# Altium PCB Marvin_PCB_v3.PcbDoc
Units mm, origin at the board's own origin, x right, y up, seen from the top; angles counter-clockwise.
Board outline 72 x 82 mm, 2 copper layers (Top Layer, Bottom Layer); 46 components, 30 nets, 138 pads, 12 vias.
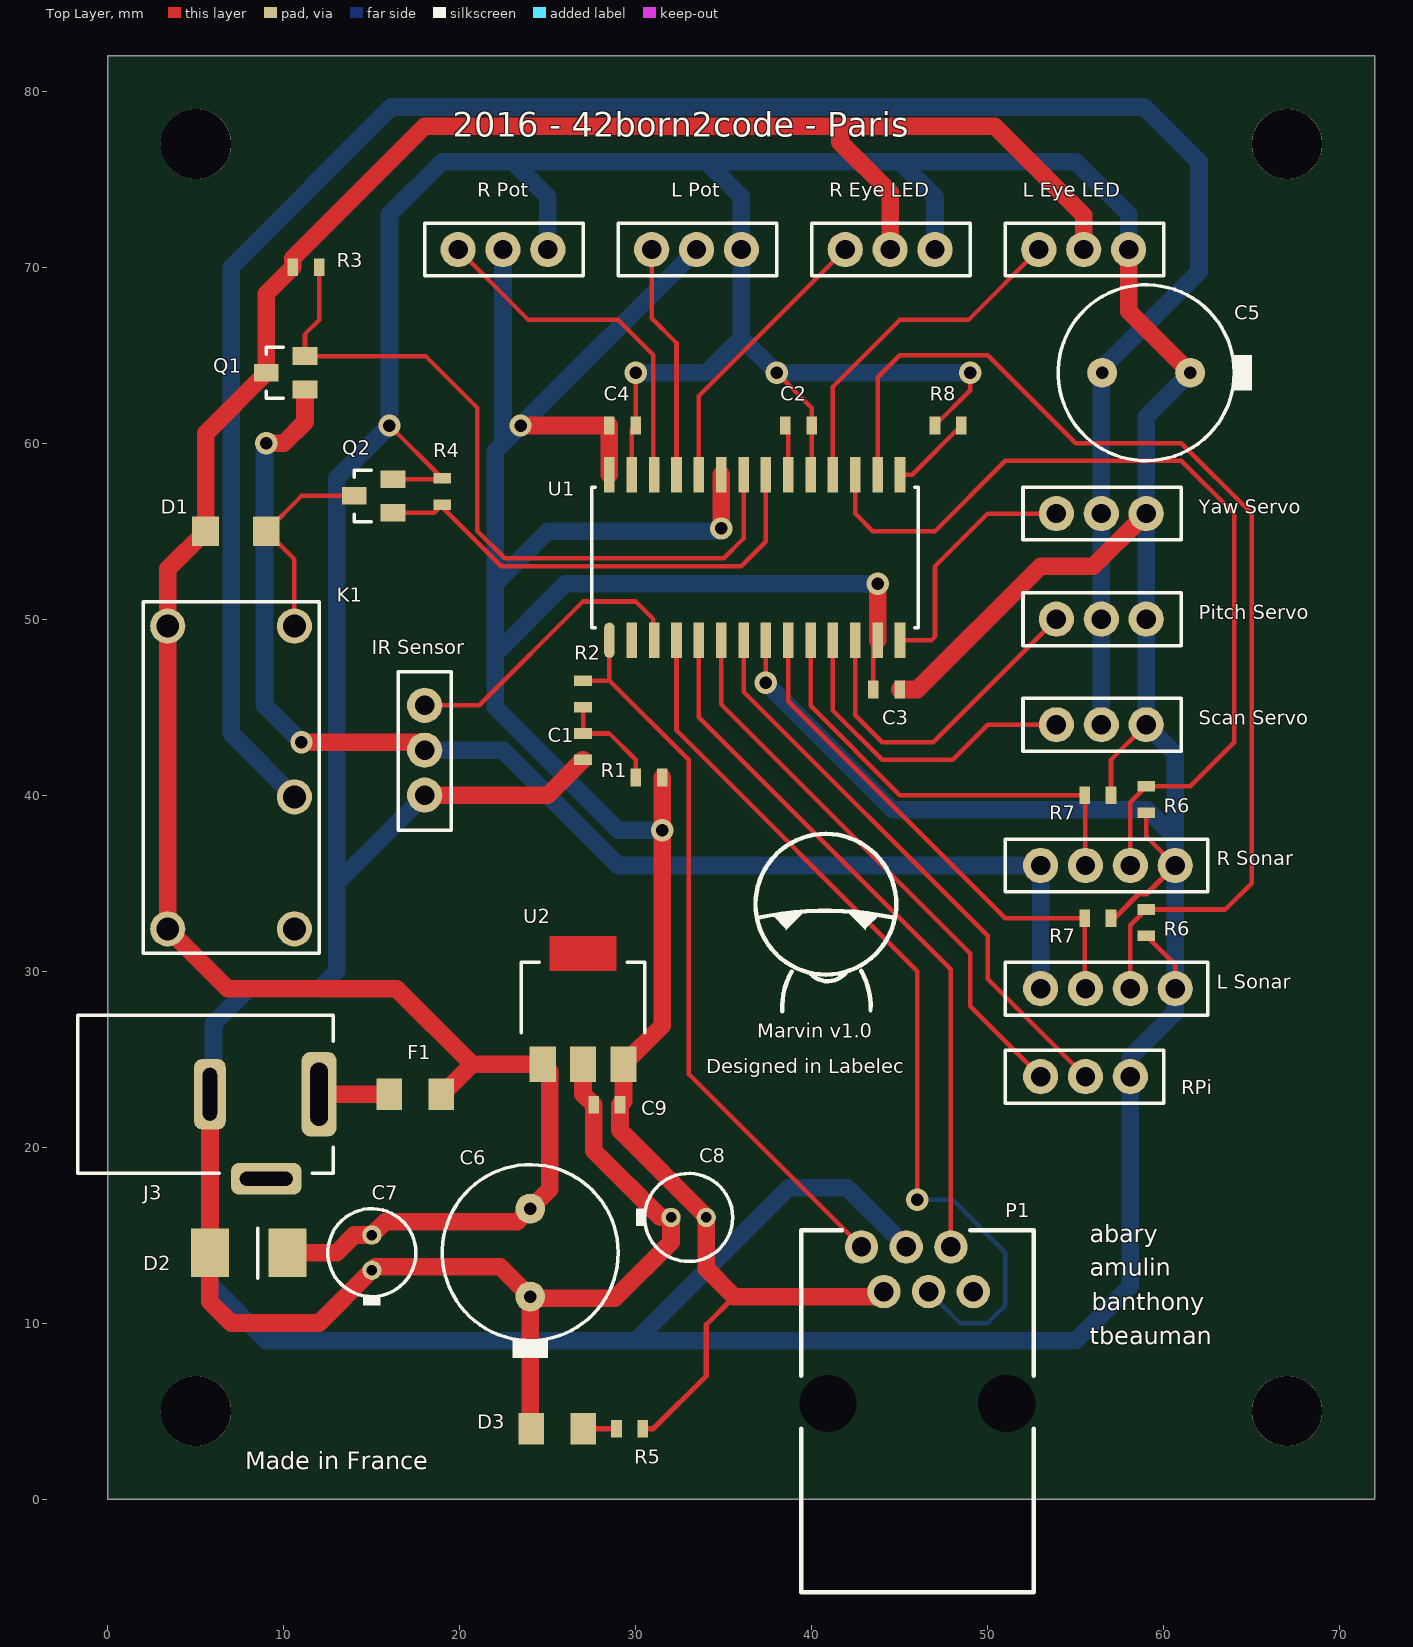
[diagram p0: Top Layer view]
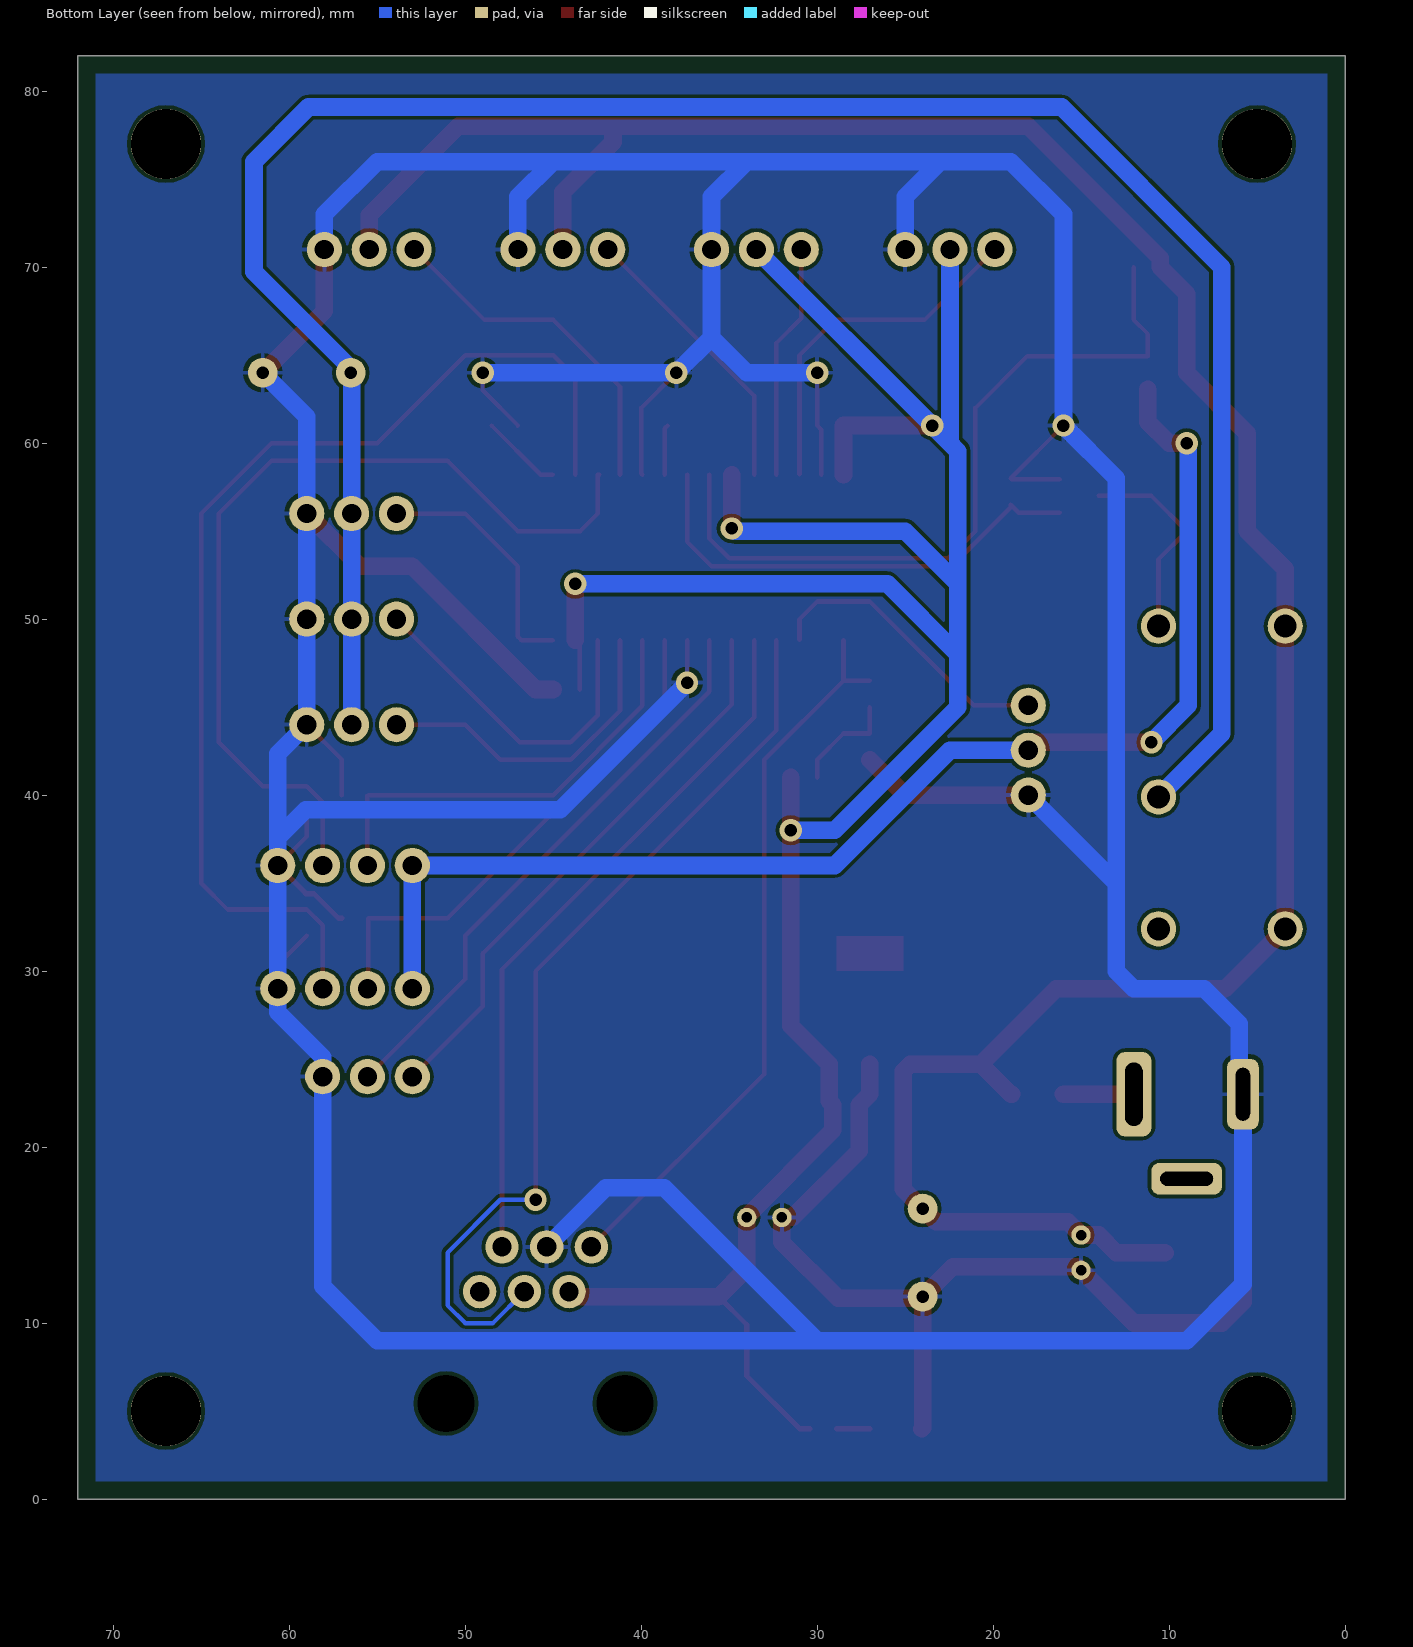
[diagram p1: Bottom Layer view, seen from below]

## Layer stack, top to bottom
Top Solder: solder mask 0.0102, Solder Resist, Dk 3.5
Top Layer: signal copper 0.0356
Dielectric 1: dielectric 0.32, FR-4, Dk 4.8
Bottom Layer: signal copper 0.0356
Bottom Solder: solder mask 0.0102, Solder Resist, Dk 3.5

## Board outline
0,0 72,0 72,82 0,82

## Design rules (kind name [scope] priority, off if disabled: settings)
Clearance [All] p1: gap=0.2
HoleSize [All] p1: absolutevalues=TRUE maxlimit=5 minlimit=0.3 maxpercent=80.000 minpercent=20.000
MinimumSolderMaskSliver [All] p1: minsoldermaskwidth=0.15
PolygonConnect [All] p1: connectstyle=Relief reliefconductorwidth=0.254 reliefentries=4 polygonreliefangle="90 Angle" airgapwidth=0.254
RoutingVias [All] p1: holewidth=0.3 width=0.7 viastyle="Through Hole" minholewidth=0.3 minwidth=0.7 maxholewidth=1 maxwidth=3
SilkToBoardRegionClearance [NOT InComponent('J3')AND NOT InComponent('P1')AND NOT InComponent('Marvin')] p1:
SolderMaskExpansion [All] p1: expansion=0.102
UnpouredPolygon [All] p1: allowunpoured=FALSE
Width [All] p1: maxlimit=2 minlimit=0.2 preferedwidth=0.2
26 further rules are at their usual default settings.

## Classes and differential pairs
channel class Sonar: U_Sonar1 U_Sonar2
channel class Servo: U_Servo1 U_Servo2 U_Servo3
channel class Potard: U_Potard1 U_Potard2
channel class LED_V3: U_LED_V31 U_LED_V32
component class U_Sonar2: J6_S2 J6_U_Sonar2 R6_U_Sonar1 R7_U_Sonar2
component class U_Sonar1: J6_S1 "R Sonar"
component class U_Servo3: J5_SERV3 J5_U_Servo3
component class U_Servo2: J5_SERV2 J5_U_Servo2
component class U_Servo1: J5_SERV1 J5_U_Servo1
component class U_RPI: J4 J4_RPI
component class U_Regul: C6 C7 C8 C9 D2 D3 F1 J3 R5 U2
component class U_Power_v2: C5 D1 K1 Q1 Q2 R3 R4
component class U_Potard2: J2_P2 J2_U_Potard2
component class U_Potard1: J2_P1
component class U_PIC: C1 C2 C3 C4 P1 R1 R2 R8 U1
component class U_LED_V32: J7_LED2 J7_U_LED_V32
component class U_LED_V31: J7_LED1
component class U_IrSensor: J1 J1_IR

## Components (designator, comment, footprint, x,y, rotation, side; value= is the part's Value field where it differs from the comment)
C1 "100nF" "1608 / 0603" 27,42 r90 top
C2 "10uF" "1608 / 0603" 40,61 r180 top
C3 "100nF" "1608 / 0603" 45,46 r180 top
C4 "100nF" "1608 / 0603" 30,61 r180 top
C5 "470uF" CONDO_D_10MM 59,64 r90 top
C6 "470uF" CONDO_D_10MM 24,14 r0 top
C7 "10uF" CONDO_D_5MM 15,14 r0 top
C8 "10uF" CONDO_D_5MM 33,16 r270 top
C9 "Cap" "1608 / 0603" 27.6,22.4 r0 top
D1 "GF1A" SMA/DO-214AC_21 9,55 r180 top
D2 "D Zener 1N5338BRLG" "DIODE ZENER" 8,14 r0 top
D3 "*" "3216 / 1206" 27,4 r180 top
F1 "MCPFP 5A 125V" "3216 / 1206" 16,23 r0 top
"IR Sensor" "IR_Connector" "IR SENSOR CONNECTOR" 18,40 r90 top (schematic designator J1)
J3 "PWR2.5" RAPC712BK 12,23 r270 top
K1 "Relay-SPDT G5V-1" PE014005 7,41 r270 top
"L Eye LED" "Leds_Connector" "LEDS CONNECTOR" 58,71 r180 top (schematic designator J7)
"L Pot" "Potard_Connector" "POTARD CONNECTOR" 36,71 r180 top (schematic designator J2)
"L Sonar" "Sonar_Connector" "SONAR CONNECTOR" 53,29 r0 top (schematic designator J6)
"Marvin v1.0" "" MARVIN 40.8,33.8 r0 top
P1 "" RJ11 46,5 r180 top
"Pitch Servo" "Servo_Connector" "SERVO CONNECTOR" 59,50 r180 top (schematic designator J5)
Q1 "MOSFET-P ZVP2106A" SOT23 9,64 r90 top
Q2 "MOSFET-N 2N7002K" SOT23 14,57 r90 top
R1 "10K" "1608 / 0603" 30,41 r0 top
R2 "1K" "1608 / 0603" 27,45 r90 top
R3 "1K" "1608 / 0603" 12,70 r180 top
R4 "1K" "1608 / 0603" 19,58 r270 top
R5 "1K" "1608 / 0603" 28.9,4 r0 top
R6 "1K" "1608 / 0603" 59,32 r90 top
R6 "1K" "1608 / 0603" 59,39 r90 top
R7 "1K" "1608 / 0603" 57,33 r180 top
R7 "1K" "1608 / 0603" 57,40 r180 top
R8 "10K" "1608 / 0603" 47,61 r0 top
"R Eye LED" "Leds_Connector" "LEDS CONNECTOR" 47,71 r180 top (schematic designator J7)
"R Pot" "Potard_Connector" "POTARD CONNECTOR" 25,71 r180 top (schematic designator J2)
"R Sonar" "Sonar_Connector" "SONAR CONNECTOR" 53,36 r0 top (schematic designator J6)
RPi "RPi_Connector" "RPI CONNECTOR" 53,24 r0 top (schematic designator J4)
"Scan Servo" "Servo_Connector" "SERVO CONNECTOR" 59,44 r180 top (schematic designator J5)
U1 "PIC32MX270F256B" SOIC28 38,54 r0 top
U2 "Regul LD1117S33TR" SOT-223 27,31 r0 top
"Yaw Servo" "Servo_Connector" "SERVO CONNECTOR" 59,56 r180 top (schematic designator J5)
? "" MOUNTING_HOLE 67,77 r0 top
? "" MOUNTING_HOLE 67,5 r0 top
? "" MOUNTING_HOLE 5,5 r0 top
? "" MOUNTING_HOLE 5,77 r0 top

## Footprints (in the part's own frame and the unit in brackets; to place one, negate y for a bottom-side part, rotate by r counter-clockwise, add the part's x,y. Pads: shape width x height; smd on the part's side, far side on the other; paste and mask are expansions set on the pad)
"1608 / 0603" [mm] "0603"
  rect 0.6x1 smd mask+0.2: 1(0,0) 2(1.5,0)
"3216 / 1206" [mm]
  rect 1.45x1.8 smd mask+0.2: 1(0,0) 2(2.95,0)
CONDO_D_5MM [mm]
  round 1.1 hole 0.6 mask+0.2: 1(0,-1) 2(0,1)
  silkscreen extent -2.5,-3 2.5,2.5, body extent -2.48,-2.49 2.5,2.5, height 11.2
CONDO_D_10MM [mm]
  round 1.7 hole 0.7 mask+0.2: 1(0,-2.5) 2(0,2.5)
  silkscreen extent -5,-6 5,5, body extent -4.96,-4.99 5,4.99, height 12.7
"DIODE ZENER" [mm]
  rect 2.159x2.743 smd mask+0.2: 1(-2.21,0) 2(2.21,0)
  silkscreen extent 0.51,-1.45 0.51,1.4
"IR SENSOR CONNECTOR" [mm]
  round 2 hole 1.1 mask+0.2: 1(0,0) 2(2.55,0) 3(5.1,0)
  silkscreen extent -2,-1.5 7,1.5, body extent -1.27,-1.27 6.35,1.27, height 9.5
"LEDS CONNECTOR" [mm]
  round 2 hole 1.1 mask+0.2: 1(0,0) 2(2.55,0) 3(5.1,0)
  silkscreen extent -2,-1.5 7,1.5, body extent -1.27,-1.27 6.35,1.27, height 9.5
MARVIN [mm]
  silkscreen extent -4,-6.09 4,4
MOUNTING_HOLE [mm]
  round 4 hole 4 unplated mask+1: 8(0,0)
PE014005 [mm] "RELAIS PE014005"
  round 2 hole 1.3 mask+0.2: 11(1.1,3.6) 12(8.6,-3.6) 14(8.6,3.6) A1(-8.6,3.6) A2(-8.6,-3.6)
  silkscreen extent -10,-5 10,5, body extent -10,-5 10,5, height 10
"POTARD CONNECTOR" [mm]
  round 2 hole 1.1 mask+0.2: 1(0,0) 2(2.55,0) 3(5.1,0)
  silkscreen extent -2,-1.5 7,1.5, body extent -1.27,-1.27 6.35,1.27, height 9.5
RAPC712BK [mm] "PRISE JACK RAPC712BK"
  rrect50% 4.8x2 hole 1 slot 3.6 at 0 deg mask+0.2: 1(0,0)
  rrect50% 4x1.8 hole 0.8 slot 3 at 0 deg mask+0.2: 2(0,-6.2)
  rrect50% 1.8x4 hole 0.8 slot 3 at 90 deg mask+0.2: 3(4.8,-3)
  silkscreen extent -4.5,-13.7 4.5,0.8
RJ11 [mm]
  round 1.9 hole 1.1 mask+0.2: 1(3.175,-9.325) 2(1.905,-6.785) 3(0.635,-9.325) 4(-0.635,-6.785) 5(-1.905,-9.325)
  round 1.9 hole 1.1 unplated mask+0.2: 6(-3.175,-6.785)
  round 1.524 hole 3.25 unplated mask+0.2: ""(-5.08,-0.435) ""(5.08,-0.435)
  silkscreen extent -6.61,-10.29 6.61,10.29
"RPI CONNECTOR" [mm]
  round 2 hole 1.1 mask+0.2: 1(2.55,0) 2(0,0) 3(5.1,0)
  silkscreen extent -2,-1.5 7,1.5, body extent -1.27,-1.27 6.35,1.27, height 9.5
"SERVO CONNECTOR" [mm]
  round 2 hole 1.1 mask+0.2: 1(0,0) 2(2.55,0) 3(5.1,0)
  silkscreen extent -2,-1.5 7,1.5, body extent -1.27,-1.27 6.35,1.27, height 9.5
SMA/DO-214AC_21 [mm]
  rect 1.52x1.68 smd mask+0.2: 1(0,0) 2(3.45,0)
SOIC28 [mm] "PIC32MX270F256B"
  oval 0.6x2 smd mask+0.2: 1(-9.5,-5.2)
  rect 0.6x2 smd mask+0.2: 2(-8.23,-5.2) 3(-6.96,-5.2) 4(-5.69,-5.2) 5(-4.42,-5.2) 6(-3.15,-5.2) 7(-1.88,-5.2) 8(-0.61,-5.2) 9(0.66,-5.2) 10(1.93,-5.2) 11(3.2,-5.2) 12(4.47,-5.2) 13(5.74,-5.2) 14(7.01,-5.2) 15(7.01,4.2) 16(5.74,4.2) 17(4.47,4.2) 18(3.2,4.2) 19(1.93,4.2) 20(0.66,4.2) 21(-0.61,4.2) 22(-1.88,4.2) 23(-3.15,4.2) 24(-4.42,4.2) 25(-5.69,4.2) 26(-6.96,4.2) 27(-8.23,4.2) 28(-9.5,4.2)
  silkscreen extent -10.5,-4.5 8.05,3.5, body extent -10.26,-5.58 7.82,4.58, height 2
"SONAR CONNECTOR" [mm]
  round 2 hole 1.1 mask+0.2: 1(0,0) 2(2.55,0) 3(5.1,0) 4(7.65,0)
  silkscreen extent -2,-1.5 9.5,1.5, body extent -1.27,-1.27 8.89,1.27, height 9.5
SOT23 [mm] "MOSFET N 2N7002K"
  rect 1x1.4 smd mask+0.2: 1(-0.95,-2.2) 2(0.95,-2.2) 3(0,0)
  silkscreen extent -1.46,-0.97 1.46,0
SOT-223 [mm] "LD1117S33TR"
  rect 1.5x2 smd mask+0.2: 1(-2.3,-6.3) 2(0,-6.3) 3(2.3,-6.3)
  Top Layer region: -1.9,-1 1.9,-1 1.9,1 -1.9,1
  silkscreen extent -3.5,-4.5 3.5,-0.5

## Part data
C1 C2 C3 C4 C5 C6 C7 C8: library part Cap, "Capacitor"
C9: "Capacitor"
D1: library part Diode, "Default Diode"
D2: library part "D Zener", "Zener Diode"
D3: library part LED0, "Green LED"
F1: library part "Fuse 1", "Fuse"
"IR Sensor" "L Eye LED" "L Pot" "Pitch Servo" "R Eye LED" "R Pot" RPi "Scan Servo" "Yaw Servo": "Female Embase 3 contacts"
J3: "Jack Connector"
K1: library part Relay-SPDT, "Relay"
"L Sonar" "R Sonar": "Female Embase 4 contacts"
P1: library part "Header 6", "RJ11 Connector"
Q1: library part MOSFET-P, "P-Channel MOSFET"
Q2: library part MOSFET-N, "N-Channel MOSFET"
R1 R2 R3 R4 R5 R6 R6 R7 R7 R8: library part Res1, "Resistor"
U2: library part "Volt Reg", "Voltage Regulator"

## Via types
v1: diameter 1.27, hole 0.711, Top Layer to Bottom Layer, 12 vias

## Nets (pads, with @x,y where several pads share a name; then routed paths per layer and width w, separated by ;. In a path a pad name is that pad's centre, name@x,y a point inside that pad or via, vN(x,y) a via of type N, cw(c..) or ccw(c..) an arc to the next point about the centre after c; other vN are vias at no path point)
3V3MAIN: "L Pot.2" "R Pot.2" C3.2 C4.2 C8.2 C9.2 P1.2 R1.2 R5.2 U1.13 U1.23 U1.28 U2.3 | length 159.9
  Top Layer w0.258: C3.2 43.5,48.56 U1.13
  Top Layer w0.3: R5.2 31,4 34,7 34,9.9 35.6,11.5
  Top Layer w1: v1(23.45,61) C4.2 U1.28 ; R1.2 v1(31.5,38) 31.5,26.9 U2.3 29.3,22.6 C9.2 29.1,20.951 34,16.051 C8.2 34,13.1 35.6,11.5 P1.2@43.81,11.5 ; v1(34.85,55.15) U1.23 ; U1.13 v1(43.74,52)
  Bottom Layer w1: 22.45,71 22.45,60 ; v1(31.5,38) 29,38 22,45 22,48 ; 33.45,71 v1(23.45,61) 22.45,60 ; v1@34.7,55 25,55 22,52 ; v1(43.74,52) 26,52 22,48 ; 22,48 22,52 ; 22,52 22,59.55 22.45,60
5VIN: F1.1 J3.1 | length 4
  Top Layer w1: J3.1 F1.1
5VMAIN: "L Eye LED.2" "R Eye LED.2" C6.2 C7.2 D1.2 D2.2 F1.2 K1.12 K1.A2 Q1.3 R3.2 U2.1 | length 151.9
  Top Layer w1: D2.2 13,14 14,15 C7.2 15.75,15.75 23.25,15.75 C6.2 25.1,17.6 25.1,24.3 U2.1 20.7,24.7 ; F1.2 19,23 20.7,24.7 ; 44.45,71 44.45,74.25 41.6,77.1 41.6,78 ; 55.45,71 55.45,72.95 50.4,78 41.6,78 ; 20.7,24.7 16.4,29 6.8,29 K1.12 K1.A2 3.4,52.85 D1.2 5.55,60.55 Q1.3 9,68.5 R3.2 10.5,70.5 18,78 41.6,78
GND: "IR Sensor.1" "L Eye LED.1" "L Pot.1" "L Sonar.4" "Pitch Servo.1" "R Eye LED.1" "R Pot.1" "R Sonar.4" "Scan Servo.1" "Yaw Servo.1" C1.1 C2.1 C3.1 C4.1 C5.1 C6.1 C7.1 C8.1 C9.1 D2.1 D3.2 J3.2 P1.3 Q2.2 R4.1 R6.1 R7.1 R8.1 RPi.3 U1.8 U1.19 U1.27 U2.2 | length 461.8
  Top Layer w0.258: v1(16,61) R4.1 18.95,57.95 Q2.2 ; U1.27 29.77,60.77 C4.1 v1(30,64) ; v1(37.39,46.39) U1.8 ; v1(38,64) 40,62 C2.1 40,58.27 U1.19 ; R8.1 49,63 v1(49,64) ; R7.1@57,40 57,42 59,44 ; R6.1@59,32 60.65,30.35 60.65,29 ; R6.1@59,39 59,37.65 60.65,36
  Top Layer w0.3: R7.1@57,33 57.2,33 58.6,34.4 59.05,34.4 60.65,36
  Top Layer w1: J3.2 5.8,14.01 D2.1 5.79,11.21 7,10 12,10 C7.1 ; C7.1@15.2,13.2 22.3,13.2 C6.1 24,4.05 D3.2 ; 18,40 25,40 C1.1 ; C6.1@24.1,11.4 28.8,11.4 32,14.6 C8.1 31.4,16 27.6,19.8 C9.1 27,23 U2.2 ; C3.1 46,46 53,53 56,53 59,56 ; 58,71 58,67.5 C5.1
  Bottom Layer w1: 13,35 18,40 ; 25,71 25,74 23,76 ; v1(30,64) 34,64 36,66 ; v1(37.39,46.39) 44.605,39.175 59.063,39.175 60.65,37.588 ; P1.3 42,17.69 38.69,17.69 30,9 ; 47,71 47,74 45,76 ; v1(49,64) v1(38,64) 36,66 ; 58,71 58,73 55,76 45,76 ; C5.1 59,61.5 59,56 59,50 59,44 60.65,42.35 60.65,37.588 ; 23,76 34,76 ; 23,76 19,76 16,73 v1(16,61) 13,58 13,30 12,29 8,29 6,27 6,23.2 J3.2 5.8,12.2 9,9 30,9 ; 30,9 55,9 58.1,12.1 RPi.3 58.1,25.1 60.65,27.65 60.65,29 60.65,36 60.65,37.588 ; 34,76 45,76 ; 34,76 36,74 36,71 36,66
MCLR: P1.1 R2.2 U1.1 | length 41.9
  Top Layer w0.258: R2.2 28.5,46.5 ; U1.1 28.5,46.5 ; P1.1 33,24.15 33,42 28.5,46.5
NetC1_2: C1.2 R1.1 R2.1 | length 6.1
  Top Layer w0.258: R2.1 C1.2 28.5,43.5 30,42 R1.1
NetC2_2: C2.2 U1.20 | length 2.9
  Top Layer w0.258: C2.2 38.66,60.84 U1.20
NetD1_1: D1.1 K1.A1 Q2.3 | length 11.9
  Top Layer w0.258: K1.A1 10.6,53.4 D1.1 11,57 Q2.3
NetD3_1: D3.1 R5.1 | length 1.9
  Top Layer w0.3: D3.1 R5.1
NetJ1_3: "IR Sensor.3" U1.3 | length 17
  Top Layer w0.258: 18,45.1 21.1,45.1 27,51 30,51 31,50 U1.3@31,48.84
NetJ2_U_Potard1_3: "R Pot.3" U1.26 | length 20.3
  Top Layer w0.258: 19.9,71 23.9,67 29,67 31,65 U1.26@31,58.24
NetJ2_U_Potard2_3: "L Pot.3" U1.25 | length 13.4
  Top Layer w0.258: 30.9,71 30.9,67.1 32.31,65.69 U1.25
NetJ4_1: RPi.1 U1.7 | length 32.8
  Top Layer w0.258: U1.7 36.12,45.88 50,32 50,29.55 RPi.1
NetJ4_2: RPi.2 U1.6 | length 32.3
  Top Layer w0.258: U1.6 34.85,45.15 49,31 49,28 RPi.2
NetJ5_U_Servo1_3: "Yaw Servo.3" U1.14 | length 14.2
  Top Layer w0.258: U1.14 46.8,48.8 47,49 47,53 50,56 53.9,56
NetJ5_U_Servo2_3: "Pitch Servo.3" U1.12 | length 19.2
  Top Layer w0.258: U1.12 42.47,44.53 44,43 46.9,43 53.9,50
NetJ5_U_Servo3_3: "Scan Servo.3" U1.11 | length 18.7
  Top Layer w0.258: U1.11 41.2,44.8 44,42 48,42 50,44 53.9,44
NetJ6_U_Sonar1_2: "R Sonar.2" R7.2@55.5,40 U1.10 | length 25.4
  Top Layer w0.258: U1.10 39.93,45.07 45,40 55.5,40 55.55,39.95 55.55,36
NetJ6_U_Sonar1_3: "R Sonar.3" R6.2@59,40.5 U1.17 | length 51.1
  Top Layer w0.258: U1.17@42.371,58.2 U1.17 42.47,56 43.47,55 47,55 51,59 61,59 64,56 64,43 61.5,40.5 59,40.5 58.1,39.6 58.1,36
NetJ6_U_Sonar2_2: "L Sonar.2" R7.2@55.5,33 U1.9 | length 29.4
  Top Layer w0.258: U1.9 38.66,45.34 51,33 55.5,33 55.5,29.05 55.55,29
NetJ6_U_Sonar2_3: "L Sonar.3" R6.2@59,33.5 U1.16 | length 63.5
  Top Layer w0.258: U1.16 43.74,63.74 45,65 50,65 55,60 61,60 65,56 65,35 63.5,33.5 59,33.5 58.1,32.6 58.1,29
NetJ7_U_LED_V31_3: "R Eye LED.3" U1.24 | length 16.2
  Top Layer w0.258: U1.24 33.58,62.68 41.9,71
NetJ7_U_LED_V32_3: "L Eye LED.3" U1.18 | length 19.9
  Top Layer w0.258: U1.18 41.2,63.2 45,67 48.9,67 52.9,71
NetQ1_2: Q1.2 R3.1 U1.22 | length 43.2
  Top Layer w0.258: R3.1 12,67 11.2,66.2 Q1.2 18.05,64.95 21,62 21,55 22.542,53.458 35,53.458 36.12,54.578 U1.22
NetQ2_1: Q2.1 R4.2 U1.21 | length 27.3
  Top Layer w0.258: Q2.1 18.55,56.05 R4.2 19,56.352 22.352,53 36,53 37.39,54.39 U1.21
PGEC: P1.5 U1.5 | length 40.4
  Top Layer w0.258: U1.5 33.58,44.42 47.905,30.095 P1.5
PGED: P1.4 U1.4 | length 52.2
  Top Layer w0.258: U1.4 32.31,43.69 46,30 v1(46,17)
  Bottom Layer w0.258: v1(46,17) 48,17 51,14 51,11 50,10 48.42,10 P1.4
"SENSOR VCC": "IR Sensor.2" "L Sonar.1" "R Sonar.1" Q1.1 | length 74.8
  Top Layer w1: v1(9,60) 10,60 11.2,61.2 Q1.1 ; v1(11,43) 17.55,43 18,42.55 18.05,42.55 18.3,42.3
  Bottom Layer w1: v1(9,60) 8.9,59.9 8.9,45.1 v1(11,43) ; 18,42.55 22.45,42.55 29,36 53,36 53,29
"SERVO VCC": "Pitch Servo.2" "Scan Servo.2" "Yaw Servo.2" C5.2 K1.11 | length 125.8
  Bottom Layer w1: K1.11 7,43.5 7,70 16.1,79.1 58.9,79.1 62,76 62,69.748 56.5,64.248 C5.2 56.45,63.95 56.45,56.4 56.25,56.2 ; 56.45,44 56.45,50 56.45,56
VBUS: R8.2 U1.15 | length 4.6
  Top Layer w0.258: U1.15 45.7,58.2 R8.2
pads on no net: ?.8 J3.3 K1.14 P1. P1.6 U1.2

## Polygon pours and split planes (outlines as drawn)
GND on Bottom Layer "Bottom Layer-No Net" (solid, pour order 2): 1,81 71,81 71,1 1,1

## Silkscreen, mask and mechanical layers (free items; w line width, h text height)
Top Overlay:
  text "2016 - 42born2code - Paris" at 19.6,77.4 h1.4
  text "Designed in Labelec" at 34,24.2 h0.8
  text "abary" at 55.8,14.6 h1
  text "amulin" at 55.8,12.7 h1
  text "banthony" at 55.9,10.733 h1
  text "tbeauman" at 55.8,8.8 h1
  text "Made in France" at 7.8,1.7 h1
Drill Drawing:
  circle w0.025: c98.478,32.445 r0.381
  circle w0.025: c98.478,32.445 r0.635
  lines w0.025: 97.843,8.95 99.113,8.95 99.113,10.22 97.843,10.22 97.843,8.95 ; 97.843,13.077 98.161,13.077 98.161,12.76 98.796,12.76 98.796,13.077 99.113,13.077 99.113,13.712 98.796,13.712 98.796,14.03 98.161,14.03 98.161,13.712 97.843,13.712 97.843,13.077 ; 97.843,16.57 98.478,16.887 99.113,16.57 98.796,17.205 99.113,17.84 98.478,17.522 97.843,17.84 98.161,17.205 97.843,16.57 ; 97.843,20.697 98.161,20.697 98.478,20.38 98.796,20.697 99.113,20.697 98.796,21.015 99.113,21.332 98.796,21.332 98.478,21.65 98.161,21.332 97.843,21.332 98.161,21.015 97.843,20.697 ; 97.843,25.46 99.113,25.46 98.478,24.19 97.843,25.46 ; 97.843,28 99.113,28 99.113,29.27 97.843,29.27 97.843,28 ; 97.843,36.89 99.113,36.89 98.478,35.62 97.843,36.89 ; 97.843,39.43 97.843,39.747 98.161,40.065 97.843,40.382 97.843,40.7 98.161,40.7 98.478,40.382 98.796,40.7 99.113,40.7 99.113,40.382 98.796,40.065 99.113,39.747 99.113,39.43 98.796,39.43 98.478,39.747 98.161,39.43 97.843,39.43 ; 97.843,43.875 98.478,43.24 99.113,43.875 98.478,44.51 97.843,43.875 ; 98.097,9.204 98.859,9.204 98.859,9.966 98.097,9.966 98.097,9.204 ; 98.097,36.636 98.859,36.636 98.478,35.874 98.097,36.636
  lines w0.381: 96.113,7.807 254.464,7.807 ; 96.113,45.907 254.464,45.907 ; 110.105,3.997 110.105,49.717 ; 127.829,3.997 127.829,49.717 ; 162.008,3.997 162.008,49.717 ; 174.857,3.997 174.857,49.717 ; 193.496,3.997 193.496,49.717 ; 222.494,3.997 222.494,49.717 ; 96.113,3.997 254.464,3.997 254.464,49.717 96.113,49.717 96.113,3.997
  text "Symbol" at 98.399,47.05 h1.83
  text "Hit Count" at 111.248,47.05 h1.83
  text "Finished Hole Size" at 128.972,47.05 h1.83
  text "Plated" at 163.151,47.05 h1.83
  text "Hole Type" at 176,47.05 h1.83
  text "Physical Length" at 194.639,47.05 h1.83
  text "Rout Path Length" at 223.637,47.05 h1.83
  text "1" at 111.248,43.24 h1.52
  text "1.000mm (39.37mil)" at 128.972,43.24 h1.52
  text "PTH" at 163.151,43.24 h1.52
  text "Slot" at 176,43.24 h1.52
  text "3.600mm (141.73mil)" at 194.639,43.24 h1.52
  text "2.600mm (102.36mil)" at 223.637,43.24 h1.52
  text "2" at 111.248,39.43 h1.52
  text "0.800mm (31.50mil)" at 128.972,39.43 h1.52
  text "PTH" at 163.151,39.43 h1.52
  text "Slot" at 176,39.43 h1.52
  text "3.000mm (118.11mil)" at 194.639,39.43 h1.52
  text "2.200mm (86.61mil)" at 223.637,39.43 h1.52
  text "4" at 111.248,35.62 h1.52
  text "0.600mm (23.62mil)" at 128.972,35.62 h1.52
  text "PTH" at 163.151,35.62 h1.52
  text "Round" at 176,35.62 h1.52
  text "4" at 111.248,31.81 h1.52
  text "0.700mm (27.56mil)" at 128.972,31.81 h1.52
  text "PTH" at 163.151,31.81 h1.52
  text "Round" at 176,31.81 h1.52
  text "12" at 111.248,28 h1.52
  text "0.711mm (28.00mil)" at 128.972,28 h1.52
  text "PTH" at 163.151,28 h1.52
  text "Round" at 176,28 h1.52
  text "1" at 111.248,24.19 h1.52
  text "1.100mm (43.31mil)" at 128.972,24.19 h1.52
  text "NPTH" at 163.151,24.19 h1.52
  text "Round" at 176,24.19 h1.52
  text "40" at 111.248,20.38 h1.52
  text "1.100mm (43.31mil)" at 128.972,20.38 h1.52
  text "PTH" at 163.151,20.38 h1.52
  text "Round" at 176,20.38 h1.52
  text "5" at 111.248,16.57 h1.52
  text "1.300mm (51.18mil)" at 128.972,16.57 h1.52
  text "PTH" at 163.151,16.57 h1.52
  text "Round" at 176,16.57 h1.52
  text "2" at 111.248,12.76 h1.52
  text "3.250mm (127.95mil)" at 128.972,12.76 h1.52
  text "NPTH" at 163.151,12.76 h1.52
  text "Round" at 176,12.76 h1.52
  text "4" at 111.248,8.95 h1.52
  text "4.000mm (157.48mil)" at 128.972,8.95 h1.52
  text "NPTH" at 163.151,8.95 h1.52
  text "Round" at 176,8.95 h1.52
  text "75 Total" at 111.248,5.14 h1.52
Board Outline:
  the board outline again, w0.254

## Dimensions
72,0 to 0,0 on Drill Drawing
0,0 to 0,82 on Drill Drawing